# Altium PCB 礼物.PcbDoc
Units mm, origin at the board's own origin, x right, y up, seen from the top; angles counter-clockwise.
Board outline 91.26 x 90.26 mm, 2 copper layers (Top Layer, Bottom Layer); 67 components, 0 nets, 177 pads, 0 vias.
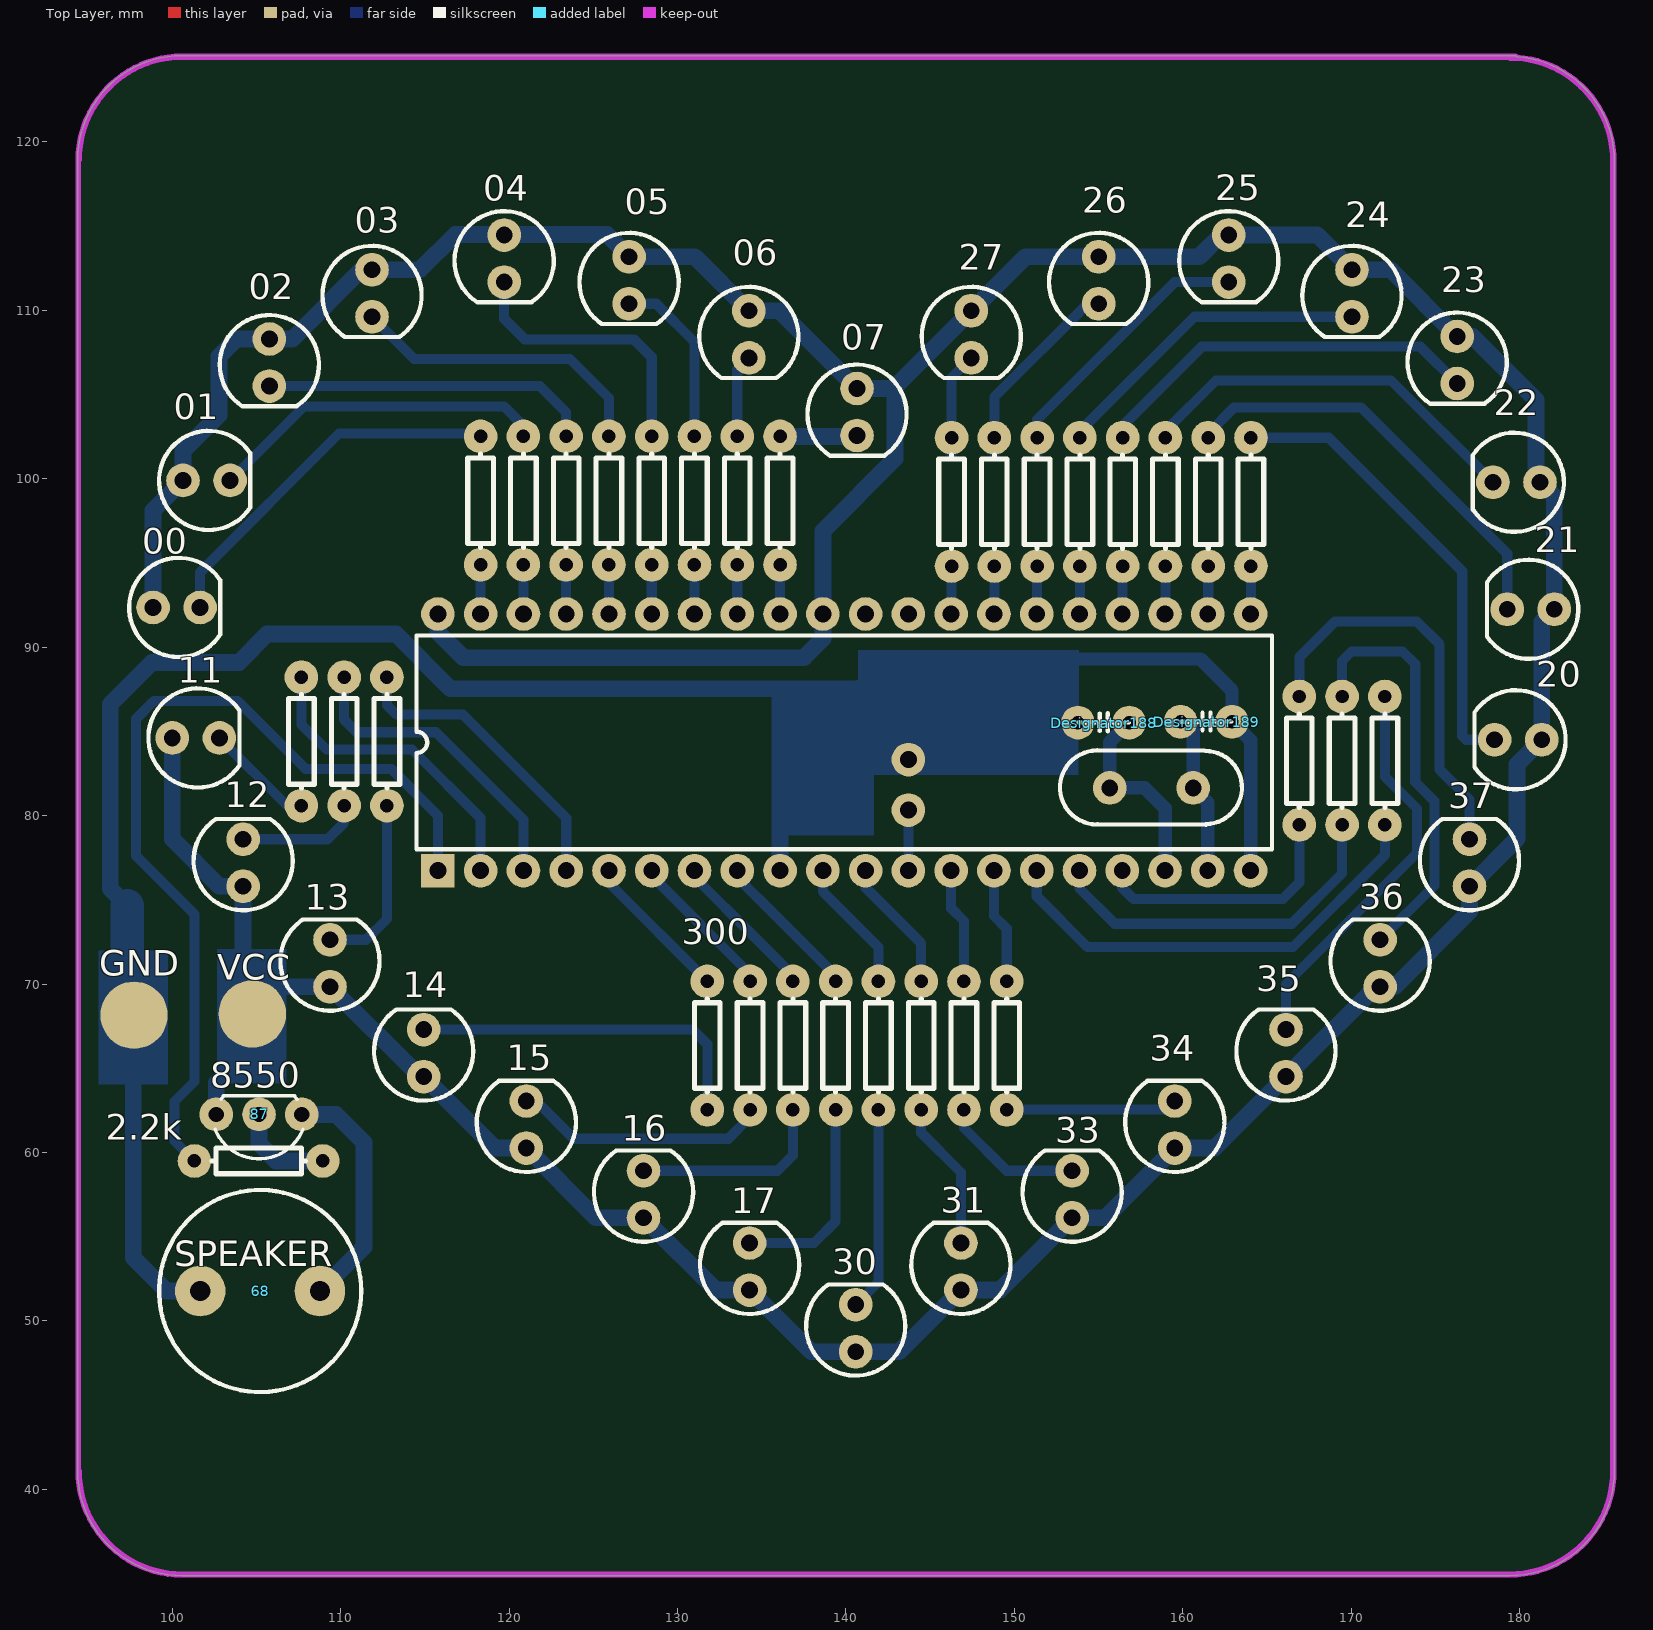
[diagram p0: Top Layer view]
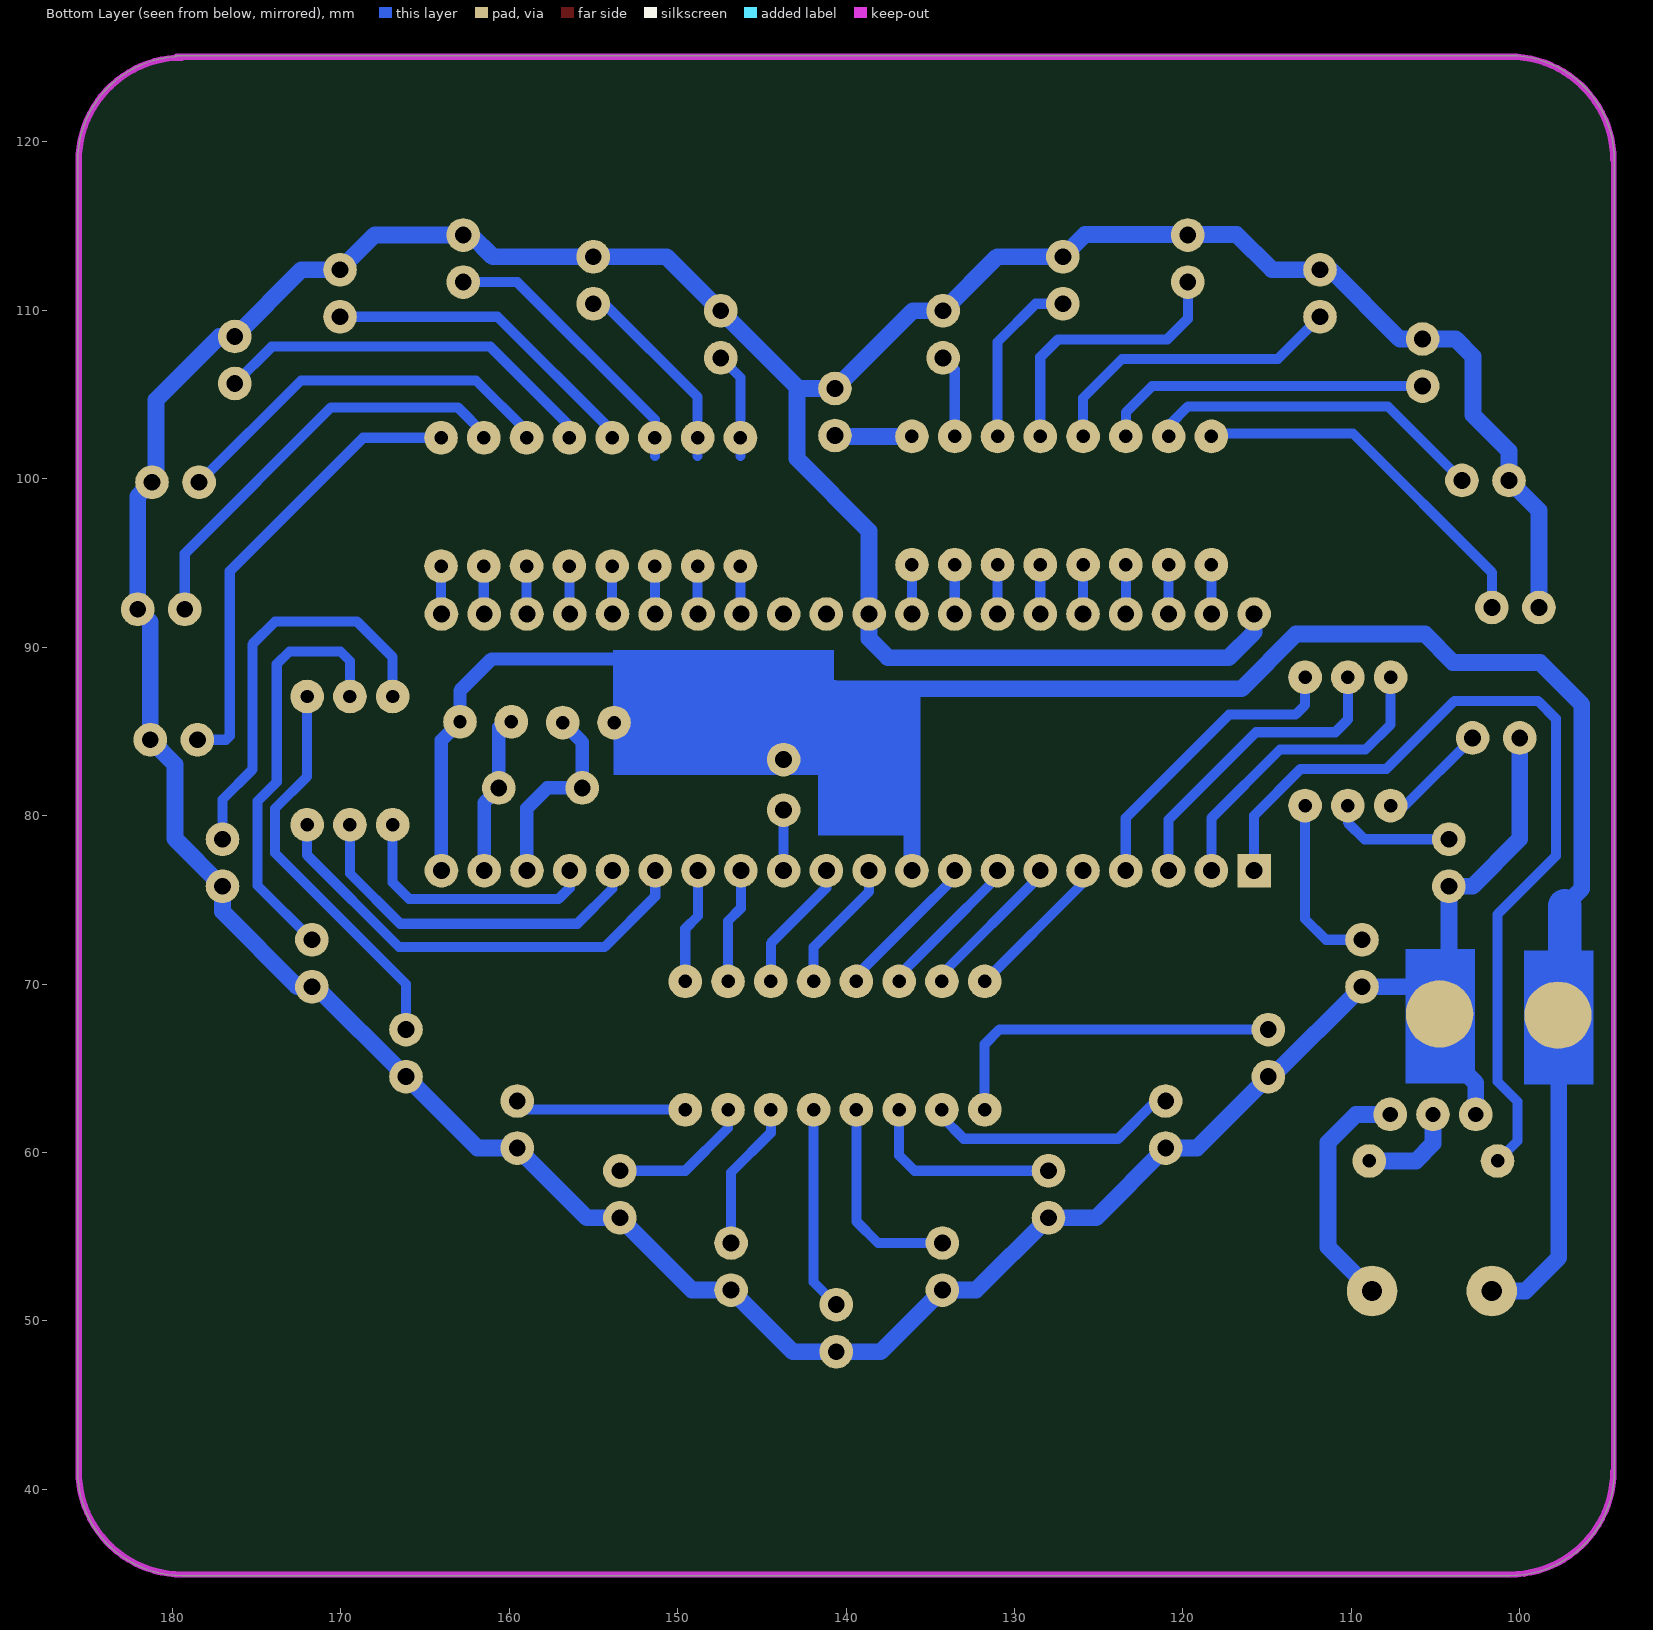
[diagram p1: Bottom Layer view, seen from below]

## Layer stack, top to bottom
Top Solder: solder mask 0.0102, Solder Resist, Dk 3.5
Top Layer: signal copper 0.0356
Dielectric1: dielectric 0.32, FR-4, Dk 4.8
Bottom Layer: signal copper 0.0356
Bottom Solder: solder mask 0.0102, Solder Resist, Dk 3.5

## Board outline
100.577,34.87 ccw(c100.577,34.998) 100.601,34.873 179.425,34.873 ccw(c179.425,41.077) 185.63,41.077 ccw(c185.502,41.077) 185.627,41.101 185.627,118.847 ccw(c185.503,118.873) 185.63,118.873 ccw(c179.425,118.873) 185.627,119.055 185.627,119.225 ccw(c185.5,119.225) 185.617,119.275 ccw(c179.425,118.873) 179.835,125.064 ccw(c179.725,125) 179.725,125.127 100.603,125.127 ccw(c100.577,125.003) 100.577,125.13 ccw(c100.577,118.925) 94.373,118.925 94.373,41.075 ccw(c100.577,41.075)

## Design rules (kind name [scope] priority, off if disabled: settings)
Clearance [All] p1: gap=0.254 ignorepadtopadclearanceinfootprint=FALSE except(0: Arc-Hole Track-Hole SMDPad-Hole THPad-Hole Via-Hole Fill-Hole Poly-Hole Region-Hole Text-Hole)
FabricationTestPointUsage TestPointUsage [All] p1: valid=0 allowmultiple=FALSE
FabricationTestpoint Testpoint [All] p1: side=3 testpointundercomponent=TRUE minsize=1.016 maxsize=2.54 preferedsize=1.524 minholesize=0 maxholesize=1.016 preferedholesize=0.813 testpointgrid=0.025 allowsidetop=TRUE allowsidebottom=TRUE usegrid=TRUE gridtolerance=0
PolygonConnect [All] p1: connectstyle=Relief reliefconductorwidth=0.254 reliefentries=4 polygonreliefangle="90 Angle" airgapwidth=0.254
RoutingVias [All] p1: holewidth=0.711 width=1.27 viastyle="Through Hole" minholewidth=0.711 minwidth=1.27 maxholewidth=0.711 maxwidth=1.27
SilkToSolderMaskClearance SilkscreenOverComponentPads [IsPad] p1: minsilkscreentomaskgap=0.254 clearancetoexposedcopper=TRUE
SolderMaskExpansion [All] p1: expansion=0.102 istentingtop=FALSE
Width [All] p1: maxlimit=0.254 minlimit=0.254 preferedwidth=0.254
27 further rules are at their usual default settings.

## Components (designator, comment, footprint, x,y, rotation, side; value= is the part's Value field where it differs from the comment)
00 "Comment" LED5 100.27,92.305 r0 top
01 "Comment" LED5 102.048,99.849 r0 top
02 "Comment" LED5 105.706,106.885 r270 top
03 "Comment" LED5 111.802,110.999 r270 top
04 "Comment" LED5 119.65,113.057 r270 top
05 "Comment" LED5 127.067,111.771 r270 top
06 "Comment" LED5 134.179,108.561 r270 top
07 "Comment" LED5 140.602,103.946 r270 top
11 "Comment" LED5 101.413,84.558 r0 top
12 "Comment" LED5 104.258,77.217 r90 top
13 "Comment" LED5 109.414,71.248 r90 top
14 "Comment" LED5 114.977,65.914 r90 top
15 "Comment" LED5 121.073,61.673 r90 top
16 "Comment" LED5 128.032,57.532 r90 top
17 "Comment" LED5 134.331,53.24 r90 top
20 "Comment" LED5 179.896,84.558 r180 top
21 "Comment" LED5 180.646,92.305 r180 top
22 "Comment" LED5 179.796,99.849 r180 top
23 "Comment" LED5 176.241,107.037 r270 top
24 "Comment" LED5 169.993,110.999 r270 top
25 "Comment" LED5 162.677,113.057 r270 top
26 "Comment" LED5 154.952,111.771 r270 top
27 "Comment" LED5 147.387,108.561 r270 top
30 "Comment" LED5 140.631,49.582 r90 top
31 "Comment" LED5 146.879,53.24 r90 top
33 "Comment" LED5 153.483,57.532 r90 top
34 "Comment" LED5 159.579,61.673 r90 top
35 "Comment" LED5 166.183,65.914 r90 top
36 "Comment" LED5 171.771,71.248 r90 top
37 "Comment" LED5 177.08,77.217 r90 top
68 "" 蜂鸣器无正极 105.21,51.769 r0 top
87 "" 直插：9014 105.134,62.285 r270 top
Designator188 "Comment" CB1 155.426,85.525 r180 top
Designator189 "Comment" CB1 161.525,85.575 r180 top
? "Comment" DIP40 115.766,76.73 r90 top
? "Comment" AXIAL0.3 161.509,98.63 r90 top
? "Comment" AXIAL0.3 158.969,98.63 r90 top
? "Comment" AXIAL0.3 156.429,98.63 r90 top
? "Comment" AXIAL0.3 153.889,98.63 r90 top
? "Comment" AXIAL0.3 151.349,98.63 r90 top
? "Comment" AXIAL0.3 148.809,98.63 r90 top
? "Comment" AXIAL0.3 146.269,98.63 r90 top
? "Comment" AXIAL0.3 164.049,98.63 r90 top
? "Comment" AXIAL0.3 136.084,98.706 r90 top
? "Comment" AXIAL0.3 118.304,98.706 r90 top
? "Comment" AXIAL0.3 120.844,98.706 r90 top
? "Comment" AXIAL0.3 123.384,98.706 r90 top
? "Comment" AXIAL0.3 125.924,98.706 r90 top
? "Comment" AXIAL0.3 128.464,98.706 r90 top
? "Comment" AXIAL0.3 131.004,98.706 r90 top
? "Comment" AXIAL0.3 133.544,98.706 r90 top
? "Comment" AXIAL0.3 112.741,84.406 r270 top
? "Comment" AXIAL0.3 110.201,84.406 r90 top
? "Comment" AXIAL0.3 107.661,84.406 r90 top
? "Comment" AXIAL0.3 172,83.263 r270 top
? "Comment" AXIAL0.3 169.46,83.263 r90 top
? "Comment" AXIAL0.3 166.92,83.263 r90 top
? "Comment" AXIAL0.3 147.006,66.346 r90 top
? "Comment" AXIAL0.3 144.466,66.346 r90 top
? "Comment" AXIAL0.3 141.926,66.346 r90 top
? "Comment" AXIAL0.3 139.386,66.346 r90 top
? "Comment" AXIAL0.3 136.846,66.346 r90 top
? "Comment" AXIAL0.3 134.306,66.346 r90 top
? "Comment" AXIAL0.3 131.766,66.346 r90 top
? "Comment" AXIAL0.3 149.546,66.346 r90 top
? "Comment" AXIAL0.3 105.121,59.491 r0 top
? "Comment" JZ 158.1,81.7 r180 top

## Footprints (in the part's own frame and the unit in brackets; to place one, negate y for a bottom-side part, rotate by r counter-clockwise, add the part's x,y. Pads: shape width x height; smd on the part's side, far side on the other; paste and mask are expansions set on the pad)
AXIAL0.3 [mm]
  round 2 hole 0.8: 1(-3.81,0) 2(3.81,0)
  silkscreen extent -2.77,-0.76 2.77,0.76
CB1 [mm]
  round 2 hole 0.8: 1(-1.397,0) 2(1.651,0)
  silkscreen extent -1.4,-0.55 1.65,0.52
DIP40 [mm]
  rect 2x2 hole 1: 1(0,0)
  round 2 hole 1: 2(0,-2.54) 3(0,-5.08) 4(0,-7.62) 5(0,-10.16) 6(0,-12.7) 7(0,-15.24) 8(0,-17.78) 9(0,-20.32) 10(0,-22.86) 11(0,-25.4) 12(0,-27.94) 13(0,-30.48) 14(0,-33.02) 15(0,-35.56) 16(0,-38.1) 17(0,-40.64) 18(0,-43.18) 19(0,-45.72) 20(0,-48.26) 21(15.24,-48.26) 22(15.24,-45.72) 23(15.24,-43.18) 24(15.24,-40.64) 25(15.24,-38.1) 26(15.24,-35.56) 27(15.24,-33.02) 28(15.24,-30.48) 29(15.24,-27.94) 30(15.24,-25.4) 31(15.24,-22.86) 32(15.24,-20.32) 33(15.24,-17.78) 34(15.24,-15.24) 35(15.24,-12.7) 36(15.24,-10.16) 37(15.24,-7.62) 38(15.24,-5.08) 39(15.24,-2.54) 40(15.24,0)
  silkscreen extent 1.27,-49.53 13.97,1.27
JZ [mm]
  round 2 hole 1: 1(-2.517,0.055) 2(2.436,0.055)
  silkscreen extent -5.41,-2.18 5.39,2.24
LED5 [mm]
  round 2 hole 1: 1(-1.416,0.054) 2(1.378,0.054)
  silkscreen extent -2.84,-2.89 2.58,3
直插：9014 [mm]
  round 2 hole 0.9: B(0.025,0.013) C(0.025,-2.527) E(0.025,2.553)
  silkscreen extent -1.08,-2.6 2.67,2.62
蜂鸣器无正极 [mm]
  round 3 hole 1.2: +(3.556,0) _(-3.556,0)
  silkscreen extent -6,-6 6,6

## Free pads (board coordinates)
  round 4 all layers, no hole: +(104.75,68.225) -(97.725,68.15)
  round 2 hole 1: +(143.706,80.325) —(143.706,83.325)

## Nets (pads, with @x,y where several pads share a name; then routed paths per layer and width w, separated by ;. In a path a pad name is that pad's centre, name@x,y a point inside that pad or via, vN(x,y) a via of type N, cw(c..) or ccw(c..) an arc to the next point about the centre after c; other vN are vias at no path point)
pads on no net: 00.1 00.2 01.1 01.2 02.1 02.2 03.1 03.2 04.1 04.2 05.1 05.2 06.1 06.2 07.1 07.2 11.1 11.2 12.1 12.2 13.1 13.2 14.1 14.2 15.1 15.2 16.1 16.2 17.1 17.2 20.1 20.2 21.1 21.2 22.1 22.2 23.1 23.2 24.1 24.2 25.1 25.2 26.1 26.2 27.1 27.2 30.1 30.2 31.1 31.2 33.1 33.2 34.1 34.2 35.1 35.2 36.1 36.2 37.1 37.2 68.+ 68._ 87.B 87.C 87.E ?.1 ?.2 ?.3 ?.4 ?.5 ?.6 ?.7 ?.8 ?.9 ?.10 ?.11 ?.12 ?.13 ?.14 ?.15 ?.16 ?.17 ?.18 ?.19 ?.20 ?.21 ?.22 ?.23 ?.24 ?.25 ?.26 ?.27 ?.28 ?.29 ?.30 ?.31 ?.32 ?.33 ?.34 ?.35 ?.36 ?.37 ?.38 ?.39 ?.40 Designator188.1 Designator188.2 Designator189.1 Designator189.2
copper on no net: | length 1224.2
  Bottom Layer w0.254: 105.134,62.285 105.835,62.285
  Bottom Layer w0.6: 101.311,59.491 100.125,60.677 100.125,63.025 101.311,64.211 101.311,74.139 97.851,77.599 97.851,85.751 98.9,86.8 103.875,86.8 107.9,82.775 113,82.775 115.766,80.009 115.766,76.73 ; 101.648,92.359 101.648,94.445 109.897,102.694 118.304,102.694 ; 102.791,84.612 106.807,80.596 107.661,80.596 ; 103.426,99.903 107.817,104.294 119.701,104.294 120.844,103.151 ; 104.204,78.595 109.217,78.595 110.201,79.58 110.201,80.596 ; 105.76,105.507 121.816,105.507 123.384,103.938 123.384,102.516 ; 107.661,88.216 107.661,85.414 109.15,83.925 114.225,83.925 118.306,79.844 118.306,76.73 ; 109.36,72.626 111.503,72.626 112.741,73.865 112.741,80.596 ; 110.201,88.216 110.201,85.699 110.95,84.95 115.65,84.95 120.846,79.754 120.846,76.73 ; 111.856,109.621 114.364,107.113 123.613,107.113 125.924,104.802 125.924,102.516 ; 113.427,88.216 112.741,88.216 112.741,86.559 113.3,86 117.25,86 123.386,79.864 123.386,76.73 ; 114.923,67.292 130.896,67.292 131.766,66.422 131.766,62.536 ; 118.304,94.896 118.304,91.973 118.306,91.97 ; 119.704,111.679 119.704,109.498 120.92,108.282 127.397,108.282 128.464,107.215 128.464,102.516 ; 120.844,94.896 120.844,91.973 120.846,91.97 ; 121.019,63.051 121.6,63.051 123.841,60.809 133.011,60.809 134.306,62.104 134.306,62.536 ; 123.384,94.896 123.384,91.973 123.386,91.97 ; 125.924,94.896 125.924,91.973 125.926,91.97 ; 125.926,76.73 125.926,75.996 131.766,70.156 ; 127.121,110.393 128.74,110.393 131.004,108.129 131.004,102.516 ; 127.978,58.91 135.938,58.91 136.846,59.818 136.846,62.536 ; 128.464,94.896 128.464,91.973 128.466,91.97 ; 128.466,76.73 128.466,76.428 134.306,70.588 134.306,70.156 ; 131.004,94.896 131.004,91.973 131.006,91.97 ; 131.006,76.73 131.006,76.351 134.56,72.798 136.846,70.512 136.846,70.156 ; 133.544,94.896 133.544,91.973 133.546,91.97 ; 133.544,102.516 133.544,106.494 134.233,107.183 ; 133.546,76.73 133.546,76.326 135.881,73.992 139.386,70.486 139.386,70.156 ; 134.277,54.618 138.097,54.618 139.386,55.907 139.386,62.536 ; 136.084,94.896 136.084,91.973 136.086,91.97 ; 138.626,76.73 138.626,75.488 141.926,72.188 141.926,70.156 ; 140.577,50.96 141.926,52.31 141.926,62.536 ; 140.604,102.516 140.656,102.568 ; 141.166,76.73 141.166,75.716 144.466,72.417 144.466,70.156 ; 143.575,87.325 143.706,87.194 ; 143.706,76.73 143.706,80.674 143.831,80.799 ; 144.466,62.536 144.466,61.165 146.825,58.806 146.825,54.618 ; 146.246,76.73 146.246,74.497 147.006,73.738 147.006,70.156 ; 146.269,91.993 146.269,94.82 ; 146.269,101.347 146.269,106.011 147.441,107.183 ; 147.006,62.536 147.006,61.444 149.54,58.91 153.429,58.91 ; 148.786,76.73 148.786,74.04 149.546,73.28 149.546,70.156 ; 148.809,92.28 148.809,94.82 ; 148.809,101.347 148.809,104.853 154.35,110.393 155.006,110.393 ; 149.546,62.536 159.011,62.536 159.525,63.051 ; 151.326,76.73 151.326,75.208 154.335,72.2 166.55,72.2 172,77.649 172,79.453 ; 151.349,91.993 151.349,94.82 ; 151.349,101.347 151.349,103.506 159.522,111.679 162.731,111.679 ; 153.866,76.73 153.866,75.666 155.957,73.575 166.478,73.575 169.46,76.557 169.46,79.453 ; 153.889,91.993 153.889,94.82 ; 153.889,102.821 160.69,109.621 170.047,109.621 ; 156.406,76.73 156.406,75.716 157.064,75.058 165.954,75.058 166.92,76.024 166.92,79.453 ; 156.429,91.993 156.429,94.82 ; 156.429,103.151 161.128,107.85 174.105,107.85 176.295,105.659 ; 158.969,91.993 158.969,94.82 ; 158.969,102.846 161.967,105.843 172.37,105.843 178.418,99.795 ; 161.509,91.993 161.509,94.82 ; 161.509,102.694 163.059,104.243 170.577,104.243 179.268,95.552 179.268,92.251 ; 164.049,91.993 164.049,94.82 ; 164.049,102.44 168.672,102.44 176.597,94.515 176.597,84.736 176.829,84.504 178.518,84.504 ; 166.129,67.292 166.129,70.001 173.905,77.776 173.905,80.265 173.905,80.418 172,82.323 172,87.073 ; 166.92,87.073 166.92,89.409 169.028,91.518 173.905,91.518 175.251,90.171 175.251,82.729 177.026,80.954 177.026,78.595 ; 169.46,87.073 169.46,89.185 170.025,89.75 173.05,89.75 173.803,88.997 173.803,87.275 ; 171.717,72.626 174.946,75.855 174.946,80.85 173.803,81.993 173.803,88.063
  Bottom Layer w0.8: 153.675,89.3 161.05,89.3 162.922,87.428 162.922,85.575 164.026,84.471 164.026,76.73 ; 156.823,85.525 155.664,84.366 155.664,81.645 157.73,81.645 158.946,80.429 158.946,76.73 ; 159.874,85.575 160.275,85.575 160.617,85.233 160.617,81.645 ; 161.486,76.73 161.486,80.776 ; 160.617,81.645 161.486,80.776 ; 160.617,81.645 161.486,80.776
  Bottom Layer w1: 97.325,74.65 96.308,75.667 96.308,86.608 98.8,89.1 103.95,89.1 105.625,90.775 113.275,90.775 116.522,87.528 143.7,87.528 ; 97.675,64.4 97.675,53.75 99.656,51.769 101.654,51.769 ; 98.854,92.359 98.854,98.125 100.632,99.903 100.632,101.659 102.759,103.786 102.759,107.266 103.794,108.301 105.76,108.301 107.122,108.301 111.236,112.415 111.856,112.415 114.716,112.415 116.805,114.505 119.93,114.505 125.804,114.505 127.121,113.187 131.023,113.187 134.233,109.977 136.042,109.977 140.656,105.362 142.686,105.362 142.917,105.132 ; 99.997,84.612 99.997,78.608 102.804,75.801 104.204,75.801 104.204,73.487 ; 102.607,62.26 102.607,64.132 104.204,65.729 104.204,75.375 ; 104.321,69.832 109.36,69.832 114.694,64.498 114.923,64.498 119.164,60.257 121.019,60.257 125.159,56.116 127.978,56.116 132.271,51.824 134.277,51.824 137.935,48.166 140.577,48.166 143.167,48.166 146.825,51.824 149.136,51.824 153.429,56.116 155.385,56.116 159.525,60.257 161.887,60.257 166.129,64.498 171.463,69.832 171.717,69.832 172.565,69.832 177.026,74.293 177.026,75.801 ; 105.134,62.285 105.134,60.516 106.159,59.491 108.931,59.491 ; 107.687,62.26 109.715,62.26 111.375,60.6 111.375,54.379 108.766,51.769 ; 115.766,91.97 115.766,90.884 117.275,89.375 137.497,89.375 137.659,89.536 138.626,90.504 138.626,91.97 138.626,96.905 142.917,101.195 142.917,105.453 150.651,113.187 160.979,113.187 162.265,114.473 167.99,114.473 170.047,112.415 172.333,112.415 176.295,108.453 177.213,108.453 180.975,104.691 180.975,100.032 182.062,98.945 182.062,92.251 181.312,91.501 181.312,84.504 179.848,83.04 179.848,78.624 177.026,75.801 ; 136.084,102.516 140.604,102.516 ; 136.086,76.73 136.086,87.325 ; 143.706,83.325 143.706,87.194 ; 177.026,74.446 177.026,75.801
  Bottom Layer w2: 97.325,72.15 97.325,74.65

## Keep-outs
Keep-Out Layer:
  lines w0.254: 94.45,41.075 94.45,118.925 ; 94.5,41.075 ccw(c100.577,41.075) 100.577,34.998 ; 94.5,118.925 cw(c100.577,118.925) 100.577,125.003 ; 100.575,35 179.425,35 ccw(c179.425,41.077) 185.502,41.077 ; 100.577,125 179.725,125 ; 179.425,124.95 cw(c179.425,118.873) 185.503,118.873 ; 185.5,41.075 185.5,119.225 ; 94.373,41.075 ccw(c100.577,41.075) 100.577,34.87 ccw(c100.577,34.998) 100.601,34.873 179.425,34.873 ccw(c179.425,41.077) 185.63,41.077 ccw(c185.502,41.077) 185.627,41.101 185.627,118.847 ccw(c185.503,118.873) 185.63,118.873 ccw(c179.425,118.873) 185.627,119.055 185.627,119.225 ccw(c185.5,119.225) 185.617,119.275 ccw(c179.425,118.873) 179.835,125.064 ccw(c179.725,125) 179.725,125.127 100.603,125.127 ccw(c100.577,125.003) 100.577,125.13 ccw(c100.577,118.925) 94.373,118.925 94.373,41.075

## Other copper
Bottom Layer:
  rectangle: 102.65,64.1 106.775,72.075
  rectangle: 95.625,64.025 99.75,72
  rectangle: 136.025,78.825 141.675,87.528
  rectangle: 140.575,82.4 153.8,88.05
  rectangle: 140.7,84.85 153.85,89.825

## Silkscreen, mask and mechanical layers (free items; w line width, h text height)
Top Overlay:
  text "300" at 130.25,72.35 h1.52
  text "GND" at 95.65,70.5 h1.52
  text "VCC" at 102.675,70.25 h1.52
  text "8550" at 102.25,63.825 h1.52
  text "2.2k" at 96.05,60.75 h1.52
  text "SPEAKER" at 100.125,53.225 h1.52